# Altium PCB PCB2.PcbDoc
Units mm, origin at the board's own origin, x right, y up, seen from the top; angles counter-clockwise.
Board outline 60 x 60 mm, 2 copper layers (Top Layer, Bottom Layer); 2 components, 2 nets, 11 pads, 0 vias.
Unrouted connection lines stored in the file: 4.
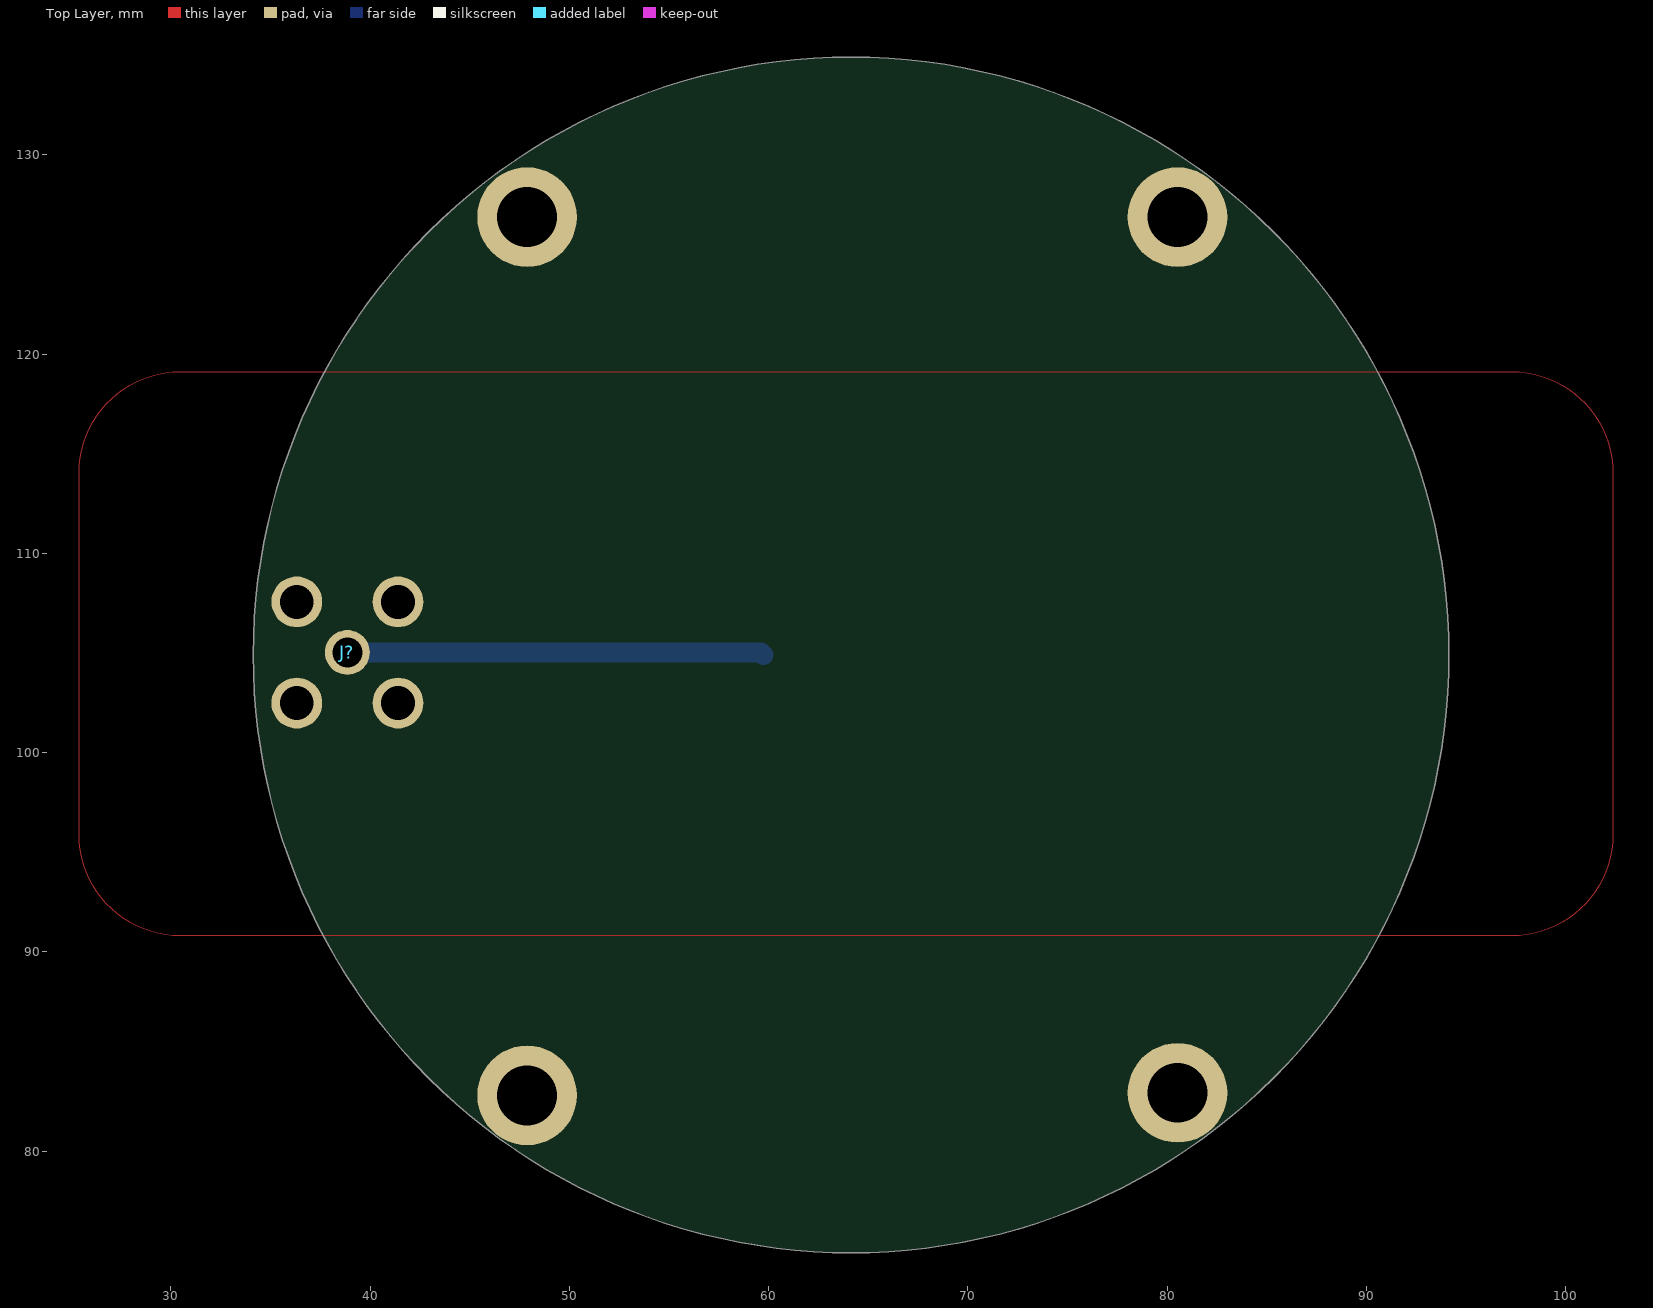
[diagram p0: Top Layer view]
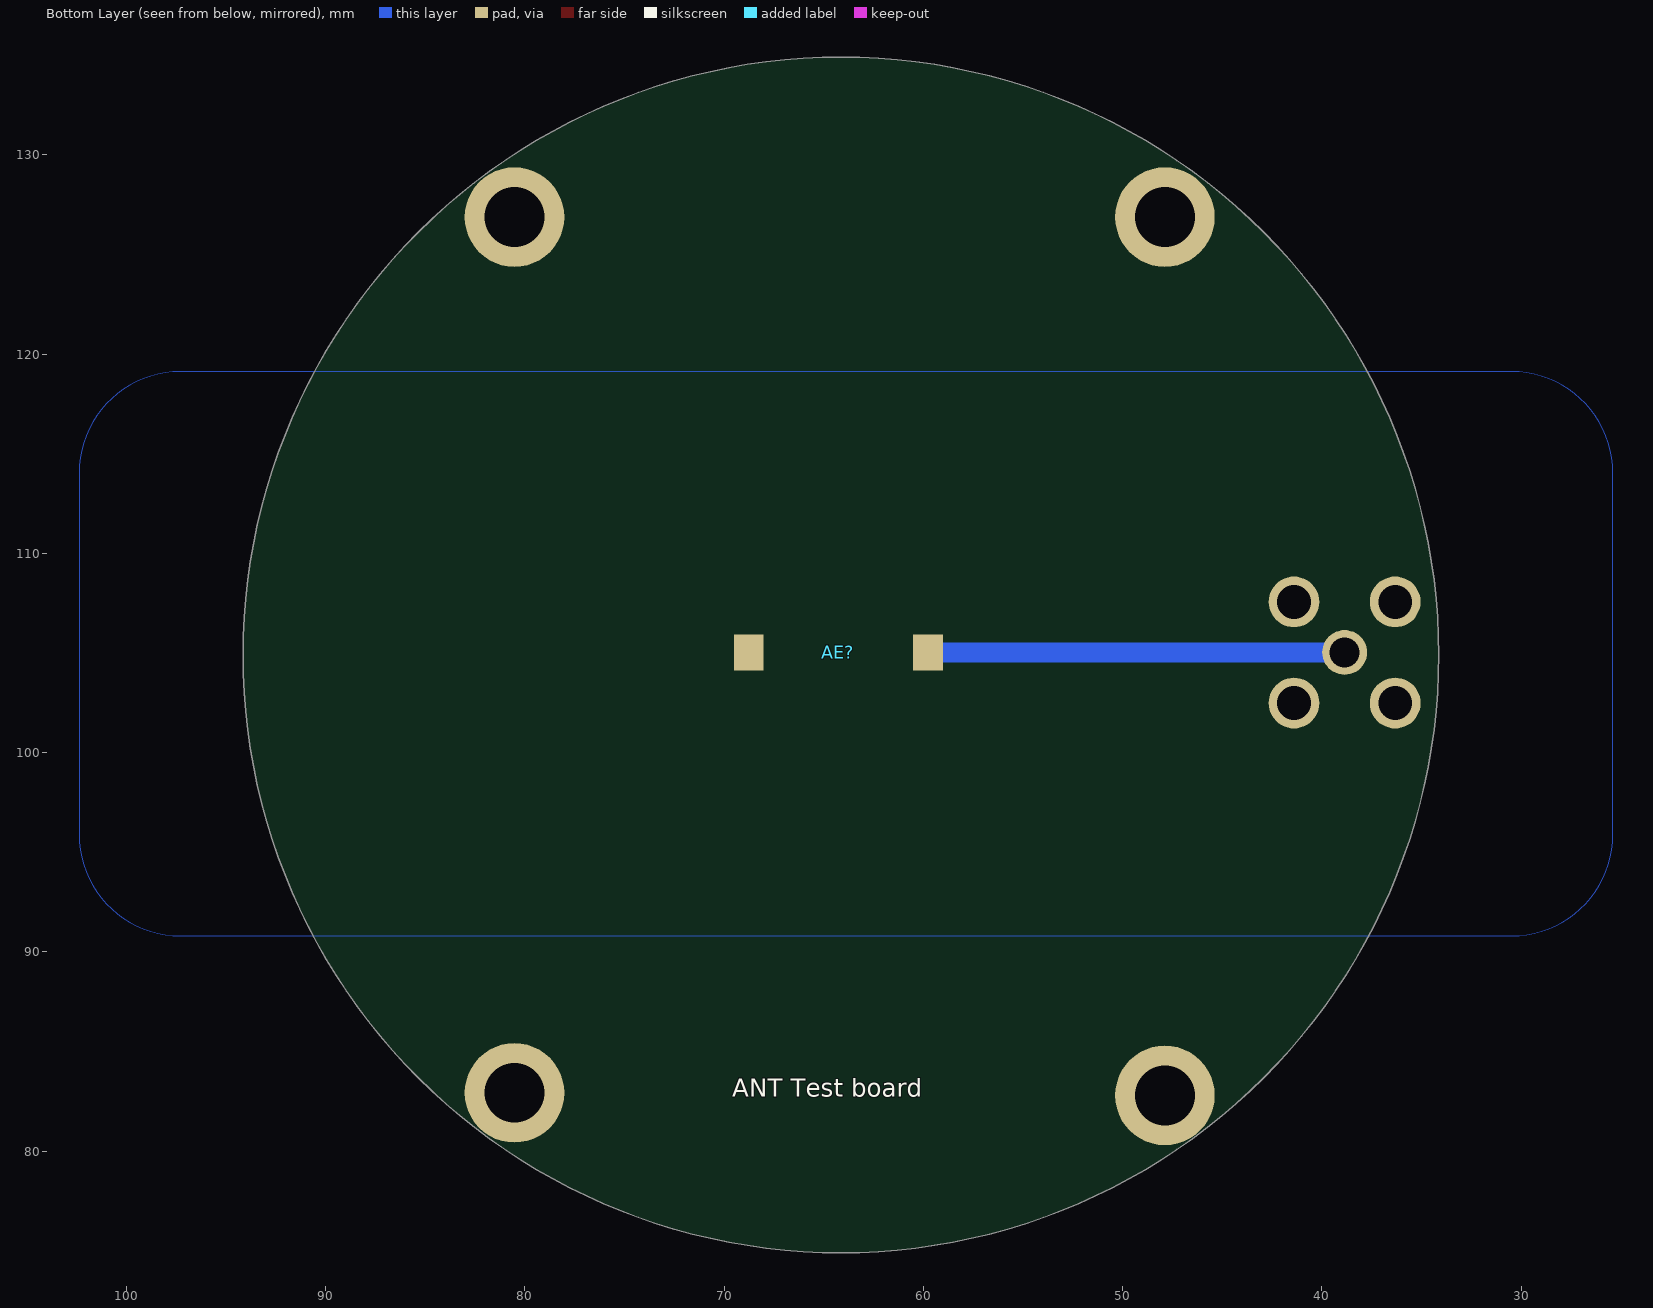
[diagram p1: Bottom Layer view, seen from below]

## Layer stack, top to bottom
Top Solder: solder mask 0.0102, Solder Resist, Dk 3.5
Top Layer: signal copper 0.0356
Dielectric 1: dielectric 0.32, FR-4, Dk 4.8
Bottom Layer: signal copper 0.0356
Bottom Solder: solder mask 0.0102, Solder Resist, Dk 3.5

## Board outline
64.135,74.902 cw(c64.135,104.902) 34.135,104.902 cw(c64.135,104.902) 64.135,134.902 cw(c64.135,104.902) 94.135,104.902 cw(c64.135,104.902)

## Design rules (kind name [scope] priority, off if disabled: settings)
Clearance [All] p1: gap=0.155 ignorepadtopadclearanceinfootprint=FALSE
PolygonConnect [All] p1: connectstyle=Relief reliefconductorwidth=0.254 reliefentries=4 polygonreliefangle="90 Angle" airgapwidth=0.254
RoutingVias [All] p1: holewidth=0.711 width=1.27 viastyle="Through Hole" minholewidth=0.711 minwidth=1.27 maxholewidth=0.711 maxwidth=1.27
SolderMaskExpansion [All] p1: expansion=0.102 istentingtop=FALSE
Width [All] p1: maxlimit=1 minlimit=0.155 preferedwidth=0.254
30 further rules are at their usual default settings.

## Components (designator, comment, footprint, x,y, rotation, side; value= is the part's Value field where it differs from the comment)
AE? "2400-2500MHz, 3dBi" 7488910245 64.262,105.029 r0 bottom
J? "60311002114501" 60311002114501 38.862,105.029 r270 top

## Footprints (in the part's own frame and the unit in brackets; to place one, negate y for a bottom-side part, rotate by r counter-clockwise, add the part's x,y. Pads: shape width x height; smd on the part's side, far side on the other; paste and mask are expansions set on the pad)
7488910245 [mm] "SMT Multilayer Chip Antenna, body 9.5x2mm"
  rect 1.5x1.8 smd: 1(-4.5,0) 2(4.5,0)
  body extent -4.75,-1 4.75,1, height 1.2
60311002114501 [mm] "SMA PCB THT Jack Right Angle"
  round 2.25 hole 1.5: 1(0,0)
  round 2.55 hole 1.7: 2(-2.54,2.54) 3(2.54,2.54) 4(2.54,-2.54) 5(-2.54,-2.54)
  body extent -3.5,-11.5 3.5,3.5, height 9.66

## Part data
AE?: library part 7488910245, "WE-MCA SMT Multilayer Chip Antenna, size 9.5x2mm, 2400-2500MHz, 3dBi", Frequency Range=2400-2500MHz, Operating Temperature="-40 to +85degC", Power Capacity=3W, Average Gain=1dBi, ComponentLink1Description=Manufacturer, ComponentLink1URL=http://www.we-online.de, ComponentLink2Description=Datasheet, ComponentLink2URL=https://katalog.we-online.com/pbs/datasheet/7488910245.pdf, Mounting Technology=SMT, Packaging="Tape and Reel", Part Number=7488910245, Peak Gain=3dBi, Published Date="July 2019", Publisher="Wurth Elektronik", Size=9.5x2mm, VSWR=2
J?: "WR-SMA PCB Jack, THT, Right Angle", Frequency Range=DC~18GHz, Operating Temperature="-65 to +165degC", Center Contact Diameter=1.27mm, ComponentLink1Description=Manufacturer, ComponentLink1URL=http://www.we-online.de, ComponentLink2Description=Datasheet, ComponentLink2URL=https://katalog.we-online.com/em/datasheet/60311002114501.pdf, Connector Type=SMA, Gender=Jack, Impedance=50Ohm, Interface=MIL-STD-348, Mounting Technology=THT, Orientation Type="Right Angle", Packaging=Tray, Part Number=60311002114501, Published Date="May 2019", Publisher="Wurth Elektronik"

## Free pads (board coordinates)
  round 5 hole 3: 3(47.879,82.804) 3(47.879,126.873) 3(80.518,82.931) 3(80.518,126.873)

## Nets (pads, with @x,y where several pads share a name; then routed paths per layer and width w, separated by ;. In a path a pad name is that pad's centre, name@x,y a point inside that pad or via, vN(x,y) a via of type N, cw(c..) or ccw(c..) an arc to the next point about the centre after c; other vN are vias at no path point)
GND: J?.2 J?.3 J?.4 J?.5 pad.3
NetAE?_1: AE?.1 J?.1 | length 21.1
  Bottom Layer w1: J?.1@38.699,105.029 J?.1 59.607,105.029 AE?.1@59.734,104.902
pads on no net: AE?.2

## Polygon pours and split planes (outlines as drawn)
GND on Bottom Layer "Top Layer-No Net" (solid, shelved, pour order 4): 30.48,119.126 97.282,119.126 cw(c97.282,114.046) 102.362,114.046 102.362,95.885 cw(c97.282,95.885) 97.282,90.805 30.48,90.805 cw(c30.48,95.885) 25.4,95.885 25.4,114.046 cw(c30.48,114.046)
GND on Top Layer "Top Layer-No Net1" (solid, shelved, pour order 5): 30.48,119.126 97.282,119.126 cw(c97.282,114.046) 102.362,114.046 102.362,95.885 cw(c97.282,95.885) 97.282,90.805 30.48,90.805 cw(c30.48,95.885) 25.4,95.885 25.4,114.046 cw(c30.48,114.046)

## Other copper
Top Layer:
  pour cut-out: 56.754,113.919
  pour cut-out: 54.341,121.539

## Silkscreen, mask and mechanical layers (free items; w line width, h text height)
Bottom Overlay:
  text "ANT Test board" at 69.596,82.423 h1.52
Mechanical 1:
  circle w0.254: c64.135,104.902 r30
Mechanical 13:
  lines w0.254: 86.299,105.029 ccw(c73.3,104.902) 86.3,104.902